# EAGLE board remote (EAGLE 6.5.0)
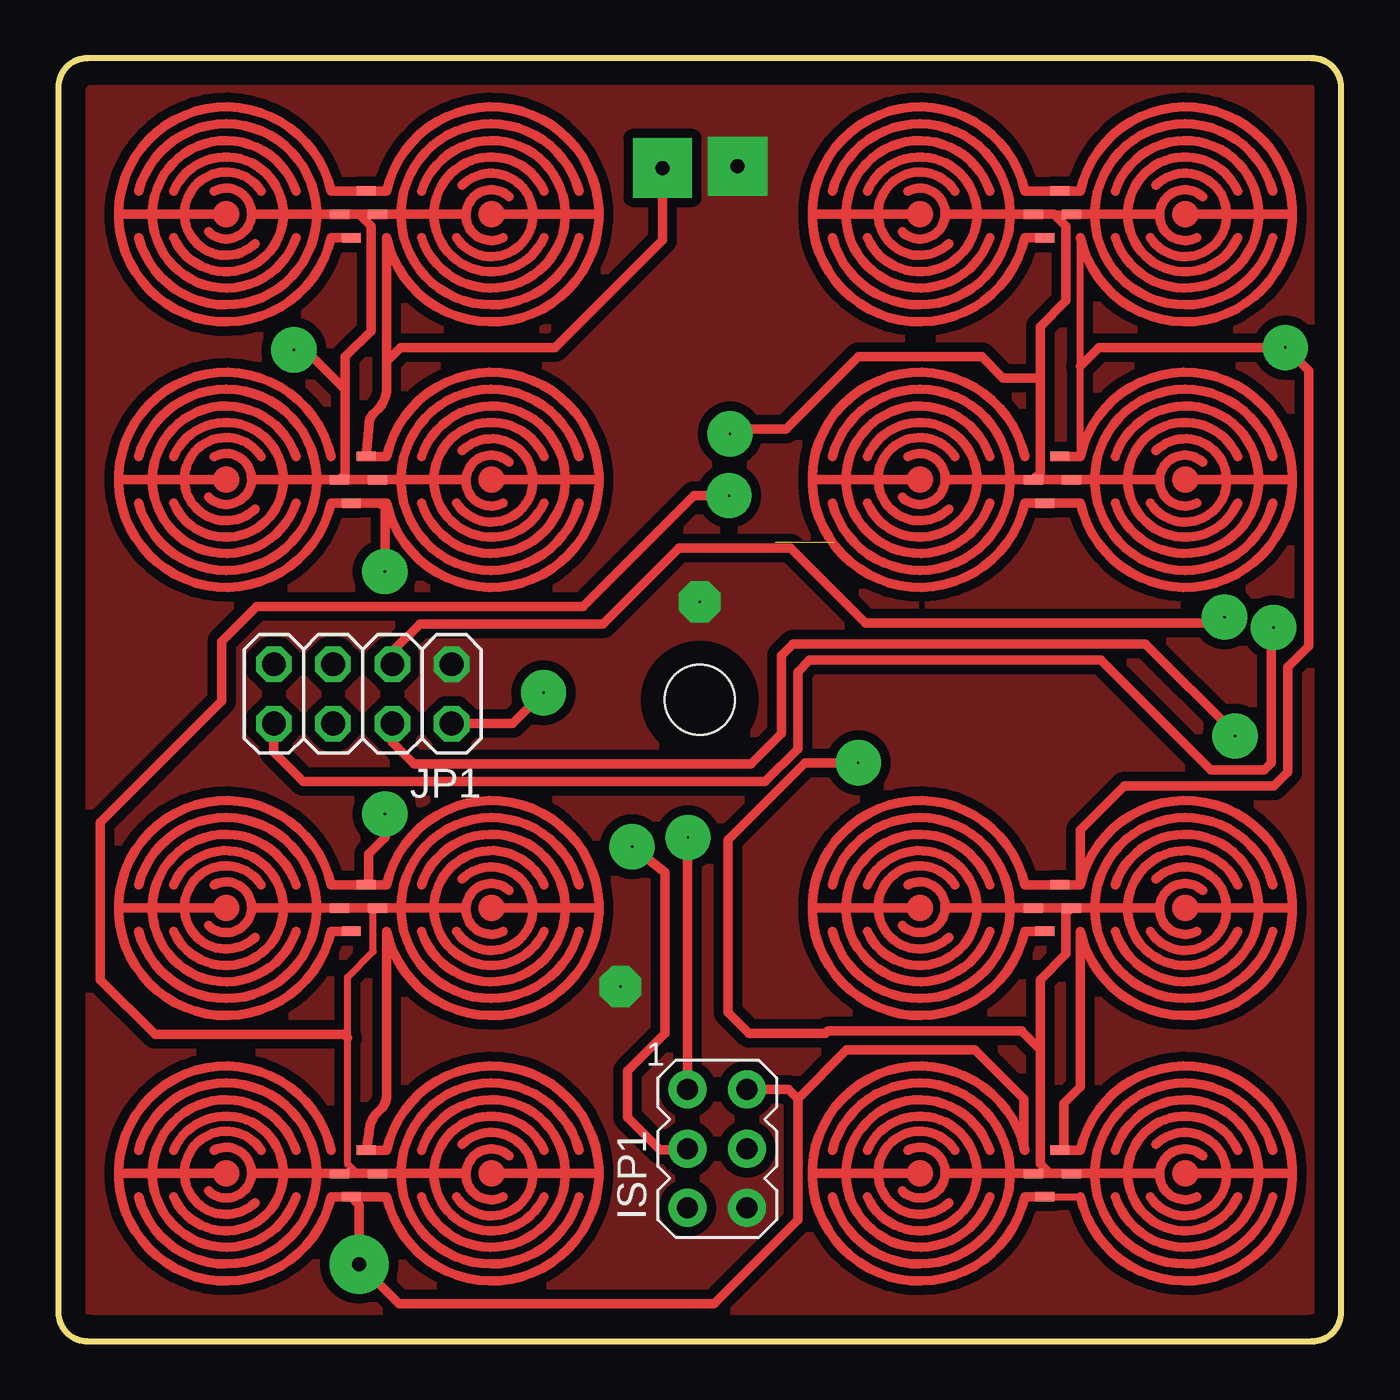
[diagram p0: board, top side]
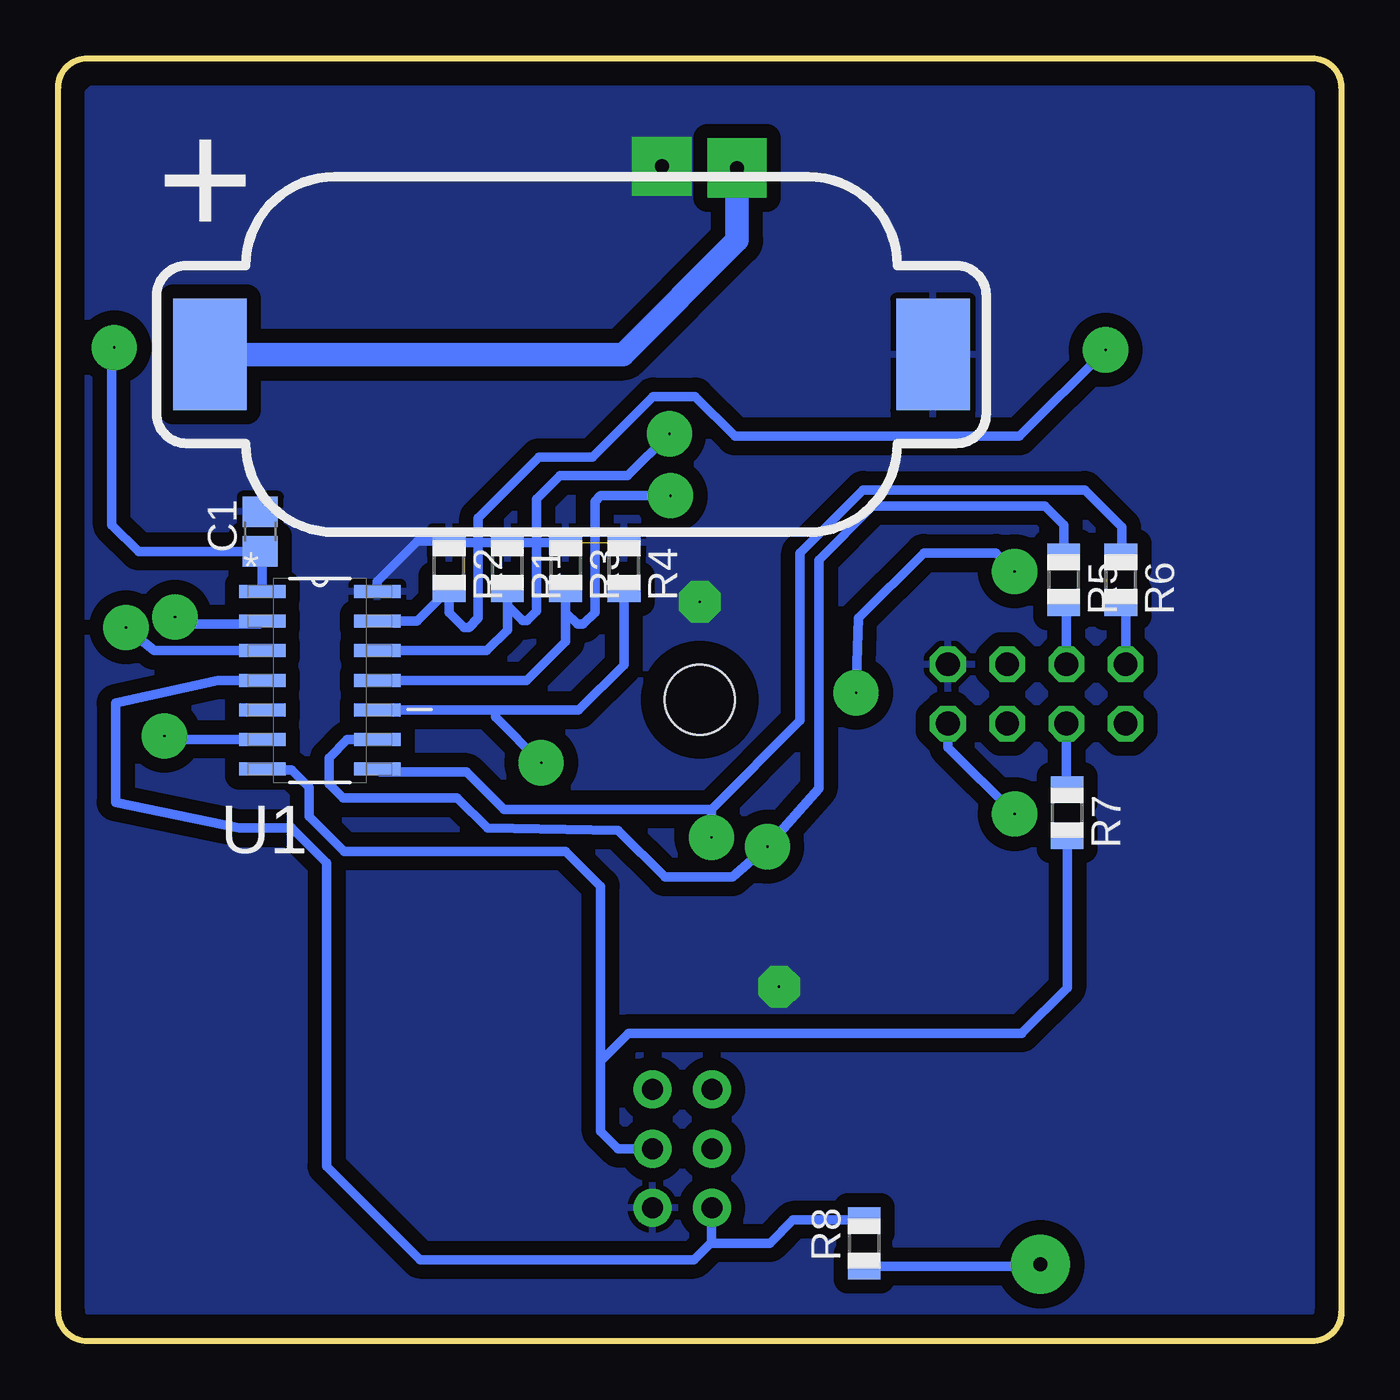
[diagram p1: board, bottom side, seen from below]

Size 55 x 55 mm. Coordinates in mm from the lower left corner, seen from the top.
Outline: 0,1.25 arc90 1.25,0 53.75,0 arc90 55,1.25 55,53.75 arc90 53.75,55 1.25,55 arc90 0,53.75 0,1.25
Copper layers (1*16): Top 0.035mm / dielectric 1.5mm / Bottom 0.035mm
Design rules "default": minimum track width 10mil, minimum drill 0.6mm, track to track 8mil, track to pad 8mil, pad to pad 8mil, via to via 8mil, smd to smd 8mil, copper to edge 40mil, drill to drill 8mil, minimum pad ring 10mil, minimum via ring 8mil, stop-mask expansion 4mil, vias tented up to drill 0mil, thermal gap 10mil
Holes 3 mm at 27.5,27.5

## Footprints (pad centres in the part's own frame; a part is rotated, then mirrored left to right if it is on the bottom)
BUTTON-25MM-4PAD = smd 0.813 x 0.406: P$1 5.375,-1; P$2 4.875,0
C0805 = smd 1.3 x 1.5: 1 -0.85,0; 2 0.85,0
AVRISP = drill 0.9 pad 1.626: 1 -1.27,2.54; 2 1.27,2.54; 3 -1.27,0; 4 1.27,0; 5 -1.27,-2.54; 6 1.27,-2.54
2X04 = drill 1.016 octagon: 1 -3.81,-1.27; 2 -3.81,1.27; 3 -1.27,-1.27; 4 -1.27,1.27; 5 1.27,-1.27; 6 1.27,1.27; 7 3.81,-1.27; 8 3.81,1.27
R0805 = smd 1.1 x 1.4: 1 -1,0; 2 1,0
SOIC127P600X175-14N = smd 1.981 x 0.559: 1 -2.464,3.81; 2 -2.464,2.54; 3 -2.464,1.27; 4 -2.464,0; 5 -2.464,-1.27; 6 -2.464,-2.54; 7 -2.464,-3.81; 8 2.464,-3.81; 9 2.464,-2.54; 10 2.464,-1.27; 11 2.464,0; 12 2.464,1.27; 13 2.464,2.54; 14 2.464,3.81
A99327CT-ND = smd 3.15 x 4.78: P$1 -15.5,0; P$2 15.5,0

## Placement (x,y rotation side)
BUTTON1-A  BUTTON-25MM-4PAD  [BUTTON-25MM-4PAD]  7.19,48.31 0 top
BUTTON1-B  BUTTON-25MM-4PAD  [BUTTON-25MM-4PAD]  18.57,48.31 180 top
BUTTON1-C  BUTTON-25MM-4PAD  [BUTTON-25MM-4PAD]  7.19,36.93 0 top
BUTTON1-D  BUTTON-25MM-4PAD  [BUTTON-25MM-4PAD]  18.57,36.93 180 top
BUTTON2-A  BUTTON-25MM-4PAD  [BUTTON-25MM-4PAD]  36.93,48.31 0 top
BUTTON2-B  BUTTON-25MM-4PAD  [BUTTON-25MM-4PAD]  48.31,48.31 180 top
BUTTON2-C  BUTTON-25MM-4PAD  [BUTTON-25MM-4PAD]  36.93,36.93 0 top
BUTTON2-D  BUTTON-25MM-4PAD  [BUTTON-25MM-4PAD]  48.31,36.93 180 top
BUTTON3-A  BUTTON-25MM-4PAD  [BUTTON-25MM-4PAD]  7.19,7.19 0 top
BUTTON3-B  BUTTON-25MM-4PAD  [BUTTON-25MM-4PAD]  18.57,7.19 180 top
BUTTON3-C  BUTTON-25MM-4PAD  [BUTTON-25MM-4PAD]  7.19,18.57 0 top
BUTTON3-D  BUTTON-25MM-4PAD  [BUTTON-25MM-4PAD]  18.57,18.57 180 top
BUTTON4-A  BUTTON-25MM-4PAD  [BUTTON-25MM-4PAD]  36.93,18.57 0 top
BUTTON4-B  BUTTON-25MM-4PAD  [BUTTON-25MM-4PAD]  48.31,18.57 180 top
BUTTON4-C  BUTTON-25MM-4PAD  [BUTTON-25MM-4PAD]  36.93,7.19 0 top
BUTTON4-D  BUTTON-25MM-4PAD  [BUTTON-25MM-4PAD]  48.31,7.19 180 top
C1  .1uf  [C0805]  46.34,34.71 90 bottom
ISP1  AVRISP-6  [AVRISP]  28.25,8.25 0 top
JP1  [2X04]  13.05,27.75 180 top
R1  [R0805]  35.75,33.25 270 bottom
R2  [R0805]  38.25,33.25 270 bottom
R3  [R0805]  33.25,33.25 270 bottom
R4  [R0805]  30.75,33.25 270 bottom
R5  10k  [R0805]  11.9,32.65 270 bottom
R6  10K  [R0805]  9.45,32.65 270 bottom
R7  10k  [R0805]  11.75,22.65 270 bottom
R8  10k  [R0805]  20.45,4.2 90 bottom
U1  ATTINY84-20SSU  [SOIC127P600X175-14N]  43.79,28.33 0 bottom
U$1  A99327CT-ND  [A99327CT-ND]  33,42.3 0 bottom

## Library data of the parts
BUTTON1-A BUTTON1-B BUTTON1-C BUTTON1-D BUTTON2-A BUTTON2-B BUTTON2-C BUTTON2-D BUTTON3-A BUTTON3-B BUTTON3-C BUTTON3-D BUTTON4-A BUTTON4-B BUTTON4-C BUTTON4-D U$1 = solids
C1 ISP1 R1-R8 = adafruit
JP1 = pinhead
U1 = Atmel_By_element14_Batch_1; MPN: ATTINY84-20SSU; OC_FARNELL: 1636955; OC_NEWARK: 03P2040; PACKAGE: SOIC-14; SUPPLIER: Atmel

## Nets
BUTTON1: BUTTON1-A.P$2 BUTTON1-B.P$2 BUTTON1-C.P$2 BUTTON1-D.P$2 R2.2 U1.13
BUTTON2: BUTTON2-A.P$2 BUTTON2-B.P$2 BUTTON2-C.P$2 BUTTON2-D.P$2 R1.2 U1.12
BUTTON3: BUTTON3-A.P$2 BUTTON3-B.P$2 BUTTON3-C.P$2 BUTTON3-D.P$2 R3.2 U1.11
BUTTON4: BUTTON4-A.P$2 BUTTON4-B.P$2 BUTTON4-C.P$2 BUTTON4-D.P$2 R4.2 U1.10
CE: JP1.3 U1.2
CSN: JP1.4 U1.6
GND: C1.2 ISP1.6 JP1.1 R1.1 R2.1 R3.1 R4.1 U1.14 U$1.P$2
IRQ: JP1.8 U1.3
MISO: ISP1.1 R6.1 U1.8
MOSI: ISP1.4 R7.2 U1.7
N$2: JP1.5 R5.2
N$3: JP1.7 R6.2
N$4: JP1.6 R7.1
RESET: ISP1.5 R8.2 U1.4
SCK: ISP1.3 R5.1 U1.9
VCC: BUTTON1-A.P$1 BUTTON1-B.P$1 BUTTON1-C.P$1 BUTTON1-D.P$1 BUTTON2-A.P$1 BUTTON2-B.P$1 BUTTON2-C.P$1 BUTTON2-D.P$1 BUTTON3-A.P$1 BUTTON3-B.P$1 BUTTON3-C.P$1 BUTTON3-D.P$1 BUTTON4-A.P$1 BUTTON4-B.P$1 BUTTON4-C.P$1 BUTTON4-D.P$1 C1.1 ISP1.2 JP1.2 R8.1 U1.1 U$1.P$1

## Tracks (layer width: path | path; a pad name or v marks a point on that pad's centre or on a via)
BUTTON1  (via drill 0.1 pad 1.93)
  Top 0.406: BUTTON1-B.P$2 BUTTON1-A.P$2 12.89,48.31 13.4,47.8 13.4,43.3 12.3,42.2 12.3,40.8 | BUTTON1-D.P$2 BUTTON1-C.P$2 12.3,37.16 12.3,40.8 | v10.1,42.5 10.6,42.5 12.3,40.8
  Bottom 0.406: U1.13 39.63,30.87 R2.2 38.25,31.25 37.6,30.6 37.4,30.6 37,31 37,35.3 34.4,37.9 32.1,37.9 29.5,40.5 27.7,40.5 26,38.8 13.8,38.8 v10.1,42.5
BUTTON2  (via drill 0.1 pad 1.93)
  Top 0.305: BUTTON2-B.P$2 BUTTON2-A.P$2
  Top 0.406: BUTTON2-D.P$2 BUTTON2-C.P$2 42.1,37.23 42.1,41.3 | 42.1,41.3 42.1,43.5 43.2,44.6 43.2,47.8 42.69,48.31 BUTTON2-A.P$2 | 42.1,41.3 40.5,41.3 39.6,42.2 34.3,42.2 31.2,39.1 29,39.1 v28.8,38.9
  Bottom 0.406: U1.12 36.65,29.6 35.75,30.5 R1.2 35.75,31.55 35.1,30.9 34.9,30.9 34.5,31.3 34.5,36.1 33.5,37.1 30.6,37.1 v28.8,38.9
BUTTON3  (via drill 0.1 pad 1.93)
  Top 0.305: BUTTON3-B.P$2 12.81,7.19 12.4,7.6 12.4,13 12.4,15.6 13.5,16.7 13.5,18.38 BUTTON3-D.P$2
  Top 0.406: BUTTON3-A.P$2 BUTTON3-B.P$2 | BUTTON3-C.P$2 BUTTON3-D.P$2 | v28.75,36.25 27.25,36.25 22.5,31.5 8.5,31.5 7,30 7,27.45 1.8,22.25 1.8,15.5 4.15,13.15 12.25,13.15 12.4,13
  Bottom 0.406: U1.11 34.92,28.33 33.25,30 R3.2 33.25,31.25 32.75,30.75 32.5,30.75 32,31.25 32,36 31.75,36.25 v28.75,36.25
BUTTON4  (via drill 0.1 pad 1.93)
  Top 0.406: BUTTON4-A.P$2 BUTTON4-B.P$2 43.2,18.34 43.2,16.6 42.1,15.5 42.1,12.5 | BUTTON4-C.P$2 BUTTON4-D.P$2 42.51,7.19 42.1,7.6 42.1,12.5 | 42.1,12.5 41.3,13.3 33,13.3 32.9,13.2 29.6,13.2 28.7,14.1 28.7,21.5 32,24.8 v34.3,24.8
  Bottom 0.406: 36.26,27.06 32.69,27.06 30.75,29 R4.2 | U1.10 36.26,27.06 | 36.26,27.06 36.26,26.76 v34.3,24.8
CE  (via drill 0.1 pad 1.93)
  Top 0.406: JP1.3 14.32,29.57 15.5,30.75 23.35,30.75 26.6,34 31.4,34 34.6,30.8 49.75,30.8 v50,31.05
  Bottom 0.406: U1.2 46.37,30.75 49.1,30.75 v50,31.05
CSN  (via drill 0.1 pad 1.93)
  Top 0.406: JP1.4 14.32,25.68 15.25,24.75 29.7,24.75 31,26.05 31,29.4 31.5,29.9 46.6,29.9 50.45,26.05 v50.45,25.95
  Bottom 0.406: U1.6 46.29,25.75 46.55,25.75 46.6,25.8 50.3,25.8 v50.45,25.95
GND  (via drill 0.1 pad 1.78, 0.6 pad 2.54)  (1 unrouted)
  Bottom 0.406: U1.14 41.32,32.58 39.6,34.3 38.3,34.3 R2.1 R1.1 R3.1
  other vias: 29.12,50.38 27.5,31.7 24.1,15.2
  pour Bottom (isolate 0.61): 1,52.75 1,2.25 arc90 2.15,0.3 52.65,0.3 arc90 54.7,2.15 54,52.75 arc90 52.75,54 2.25,54 arc90
  pour Top (isolate 0.406, no thermals, hatched): 1,52.75 1,2.25 arc90 2.35,0.4 52.85,0.4 arc90 55.3,2.55 54.4,53.05 arc90 52.75,54 2.25,54 arc90
IRQ  (via drill 0.1 pad 1.93)
  Top 0.406: JP1.8 9.24,25.26 10.5,24 30.3,24 31.7,25.4 31.7,28.7 32.2,29.2 44.7,29.2 49.4,24.5 51.7,24.5 52,24.8 52,30.7 v52.1,30.6
  Bottom 0.406: U1.3 50.9,29.6 v52.1,30.6
MISO  (via drill 0.1 pad 1.93)
  Top 0.406: ISP1.1 26.98,21.58 v27,21.6
  Bottom 0.406: v27,21.6 27,22.8 | 27,22.8 23.2,26.6 23.2,33.8 20.5,36.5 11,36.5 9.4,34.9 9.4,33.7 R6.1 | 27,22.8 35.9,22.8 37.5,24.4 41.2,24.4 U1.8
MOSI
  Bottom 0.406: U1.7 46.23,24.5 45,24.5 44.25,23.75 44.25,22.5 42.75,21 33.25,21 31.75,19.5 31.75,12 | ISP1.4 31,8.25 31.75,9 31.75,12 | R7.2 11.75,15.15 13.7,13.2 30.55,13.2 31.75,12
N$1  (via drill 0.1 pad 1.93)
  other vias: 27.5,27.5
N$2
  Bottom 0.406: JP1.5 11.78,31.53 R5.2
N$3
  Bottom 0.406: JP1.7 9.24,31.44 R6.2
N$4
  Bottom 0.406: JP1.6 11.78,23.68 R7.1
RESET
  Bottom 0.406: U1.4 48.17,28.33 52.55,27.35 52.55,23.1 47.25,22 45,22 43.5,20.5 43.5,7.5 39.5,3.5 27.75,3.5 27,4.25 | 27,4.25 27,5.69 ISP1.5 | R8.2 23.5,5.2 24.5,4.2 26.95,4.2 27,4.25
SCK  (via drill 0.1 pad 1.93)
  Top 0.406: ISP1.3 26.93,8.2 25.8,8.2 24.4,9.6 24.4,11.6 26,13.2 26,20.1 v24.6,21.2
  Bottom 0.406: R5.1 11.9,35 12.7,35.8 20.1,35.8 22.4,33.5 22.4,23.7 v24.6,21.2 26.1,19.9 29,19.9 31,21.9 36.6,22 37.9,23.3 42.8,23.3 43.4,23.9 43.4,25 42.61,25.79 U1.9
VCC  (via drill 0.1 pad 1.93, 0.6 pad 2.54)
  Top 0.305: 43.81,37.93 43.81,41.8 43.81,47.31 | BUTTON4-C.P$1 43.81,6.19
  Top 0.406: BUTTON1-B.P$1 11.69,49.31 | 14.07,47.31 14.07,42 | 14.07,42 14.07,40.84 arc-45 13.7,39.95 13.5,39.75 arc45 13.32,39.31 BUTTON1-D.P$1 | BUTTON2-B.P$1 41.43,49.31 | BUTTON2-C.P$1 43.81,35.93 | BUTTON3-B.P$1 13.32,8.93 arc-45 13.69,9.81 13.88,10 arc45 14.07,10.52 14.07,17.57 | 14.07,6.19 BUTTON3-A.P$1 12.9,5.86 v12.9,3.3 14.6,1.6 28.1,1.6 31.7,5.2 31.7,10.4 | BUTTON4-B.P$1 41.43,19.57 | 11.69,19.57 BUTTON3-D.P$1 13.3,19.68 13.3,20.9 14,21.6 v14,22.6 | BUTTON1-C.P$1 13.8,35.93 | 13.8,35.93 14.07,35.93 | 43.81,19.57 43.81,21.91 45.7,23.8 52.1,23.8 52.7,24.4 52.7,28.9 53.6,29.8 53.6,41.6 v52.6,42.6 44.61,42.6 43.81,41.8 | ISP1.2 31.31,10.79 31.7,10.4 | 31.7,10.4 33.8,12.5 39.3,12.5 41.4,10.4 41.4,8.22 41.43,8.19 | 43.81,17.57 43.81,10.91 43.1,10.2 43.1,8.36 BUTTON4-D.P$1 | JP1.2 19.48,26.48 v20.8,27.8 | v14,33 14,35.73 13.8,35.93 | v25.9,50.3 25.9,47.2 21.3,42.6 14.67,42.6 14.07,42
  Bottom 0.406: U1.1 46.25,33.77 C1.1 51.56,33.86 52.7,35 52.7,42.5 v52.6,42.6 | JP1.2 16.86,25.46 v14,22.6 | v20.8,27.8 20.7,31 17.9,33.8 14.8,33.8 v14,33 | R8.1 13,3.2 v12.9,3.3
  Bottom 1.016: U$1.P$1 30.8,42.3 25.9,47.2 v25.9,50.3